# Altium PCB bai1.PcbDoc
Units mil, origin at the board's own origin, x right, y up, seen from the top; angles counter-clockwise.
Board outline 3075 x 975 mil, 2 copper layers (Top Layer, Bottom Layer); 7 components, 6 nets, 17 pads, 0 vias.
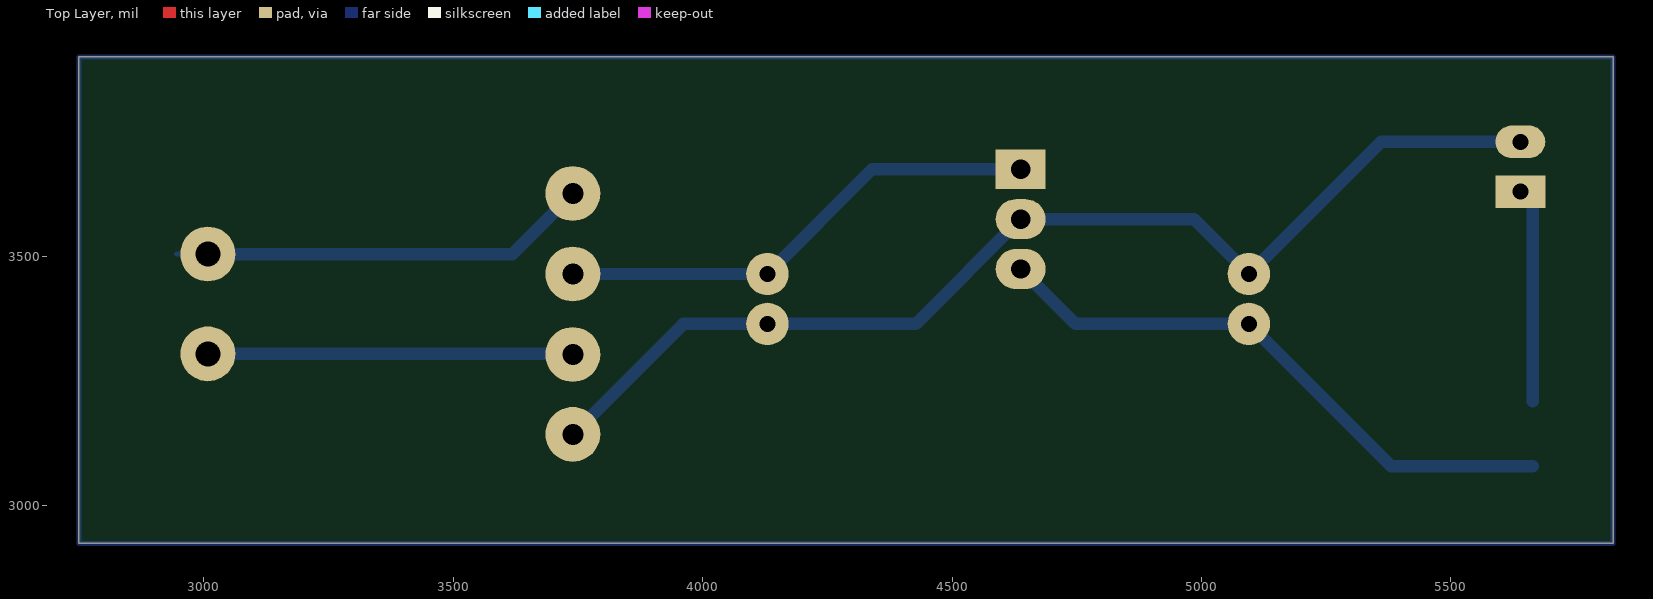
[diagram p0: Top Layer view]
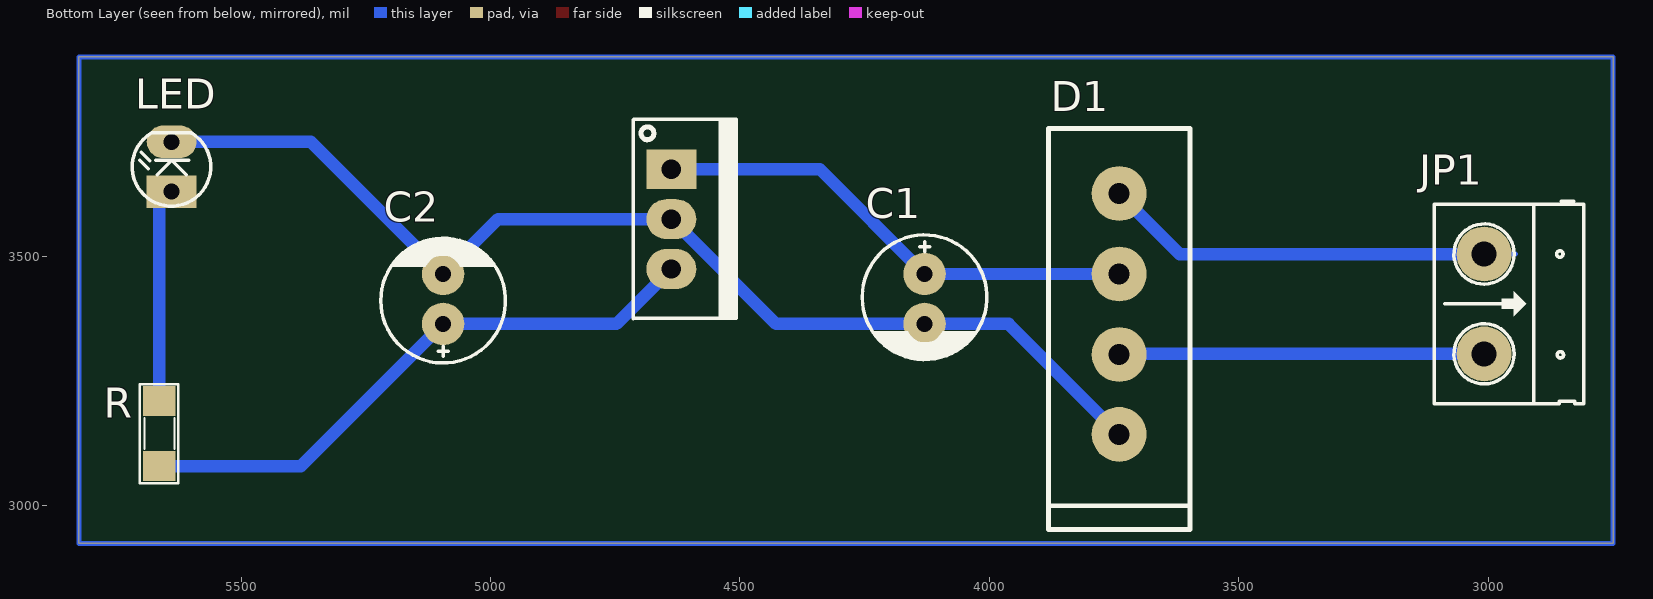
[diagram p1: Bottom Layer view, seen from below]
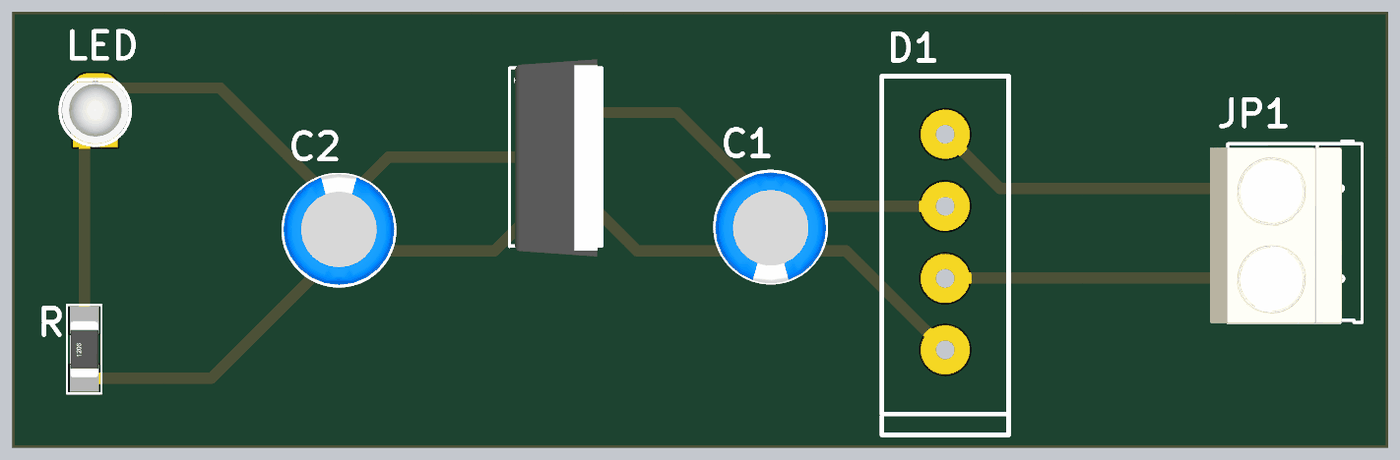
[diagram p2: 3D render of the assembled board from below, using the file's embedded part models]

## Layer stack, top to bottom
Top Solder: solder mask 0.4, Solder Resist, Dk 3.5
Top Layer: signal copper 1.4
Dielectric 1: dielectric 12.6, FR-4, Dk 4.8
Bottom Layer: signal copper 1.4
Bottom Solder: solder mask 0.4, Solder Resist, Dk 3.5

## Board outline
2750,2925 2750,3900 5825,3900 5825,2925

## Design rules (kind name [scope] priority, off if disabled: settings)
Clearance [All] p1: gap=10 ignorepadtopadclearanceinfootprint=FALSE except(0: Arc-Hole Track-Hole SMDPad-Hole THPad-Hole Via-Hole Fill-Hole Poly-Hole Region-Hole Text-Hole)
PolygonConnect [All] p1: connectstyle=Relief reliefconductorwidth=10 reliefentries=4 polygonreliefangle="90 Angle" airgapwidth=10
RoutingVias [All] p1: holewidth=28 width=50 viastyle="Through Hole" minholewidth=28 minwidth=50 maxholewidth=28 maxwidth=50
SolderMaskExpansion [All] p1: expansion=4
Width [All] p1: maxlimit=10 minlimit=10 preferedwidth=10
30 further rules are at their usual default settings.

## Components (designator, comment, footprint, x,y, rotation, side; value= is the part's Value field where it differs from the comment)
C1 "100uF/25V" tu_100uf 4130,3465 r270 bottom
C2 "100uF/25V" tu_100uf 5095,3365 r90 bottom
D1 "Bridge1" Cau_3A 3740,3142.17 r90 bottom
JP1 "Header 2_1" HED2 3008.5,3505 r270 bottom value="Header 2"
LED "LED" LED-3 5639.3,3630 r90 bottom value="LED 3 ly Single Colour"
R "1k" SM-RES-1206 5664,3080 r90 bottom value="R1/4W - 1K"
? "LM7805" QTO-220 4637.57,3675 r270 bottom

## Footprints (in the part's own frame and the unit in brackets; to place one, negate y for a bottom-side part, rotate by r counter-clockwise, add the part's x,y. Pads: shape width x height; smd on the part's side, far side on the other; paste and mask are expansions set on the pad)
Cau_3A [mil] "cau 3A"
  round 110 hole 42: 1(1.42,0) 2(161.42,0) 3(322.83,0) 4(484.25,0)
  silkscreen extent -189,-142 614,142
HED2 [mil] "Header 2, 2 pin, hight 300mil, Pin to Pin 200, Colour Green"
  round 110 hole 50: 1(0,0) 2(200,0)
  silkscreen extent -106,-100 300,200, body extent -92,-140 302,155, height 394
LED-3 [mil] "LED 2 PIN, 3ly Only colour"
  rect 65x100 hole 32: 1(0,0)
  oval 65x100 hole 32: 2(100,0)
  silkscreen extent -29,-78 118,79, body extent -25,-75 113,75, height 217
QTO-220 [mil] "TO-220 - 1-2-3"
  rect 80x100 hole 39: 1(0,0)
  oval 80x100 hole 39: 2(100,0) 3(200,0)
  silkscreen extent -100,-76 300,130, body extent -119,-64 322,121, height 755
SM-RES-1206 [mil]
  rect 60x65 smd: 1(0,0) 2(130,0)
  silkscreen extent -34,-38 164,39, body extent 2,-31 128,31, height 40
tu_100uf [mil] "Tu hoa 33 >100 uF,50V, 220uF/16V,25V"
  round 85 hole 32: 1(0,0) 2(100,0)
  silkscreen extent -78,-125 172,125, body extent -76,-124 172,124, height 422

## Part data
C1 C2: library part 9_tu_100uf_1
D1: library part 2_cau_3a
JP1: "Header, 2-Pin", Manufacturer="Generic Components", Class=Connector
LED: "LED Single colour Green and Red"
R: library part R, "Resistor 1/4W"
?: library part LM78xx, "On ap +, from + 5 to + 24VDC", =LM7808

## Nets (pads, with @x,y where several pads share a name; then routed paths per layer and width w, separated by ;. In a path a pad name is that pad's centre, name@x,y a point inside that pad or via, vN(x,y) a via of type N, cw(c..) or ccw(c..) an arc to the next point about the centre after c; other vN are vias at no path point)
GND: ?.2 C1.2 C2.2 D1.1 LED.2 | length 2233.3
  Bottom Layer w25: D1.1 3961.42,3365 C1.2 4427.57,3365 ?.2 4985,3575 C2.2 5360,3730 LED.2
Net_1: ?.1 C1.1 D1.3 | length 984.6
  Bottom Layer w25: D1.3 C1.1 4340,3675 ?.1
Net_3: ?.3 C2.1 R.1 | length 1190
  Bottom Layer w25: ?.3 4747.57,3365 C2.1 5380,3080 R.1
NetD1_2: D1.2 JP1.2 | length 734.1
  Bottom Layer w10: D1.2@3738.58,3305 D1.2 D1.2@3738.58,3305
  Bottom Layer w25: JP1.2 D1.2@3738.58,3305
NetD1_4: D1.4 JP1.1 | length 845.3
  Bottom Layer w10: 2945,3505 JP1.1
  Bottom Layer w25: JP1.1 3618.58,3505 D1.4
NetLED_1: LED.1 R.2 | length 430.2
  Bottom Layer w10: LED.1 LED.1@5664,3605.3
  Bottom Layer w25: R.2 LED.1@5664,3605.3
copper on no net: | length 8100
  Bottom Layer w10: 2750,2925 2750,3900 5825,3900 5825,2925 2750,2925